# Altium PCB PCB1.PcbDoc
Units mil, origin at the board's own origin, x right, y up, seen from the top; angles counter-clockwise.
Board outline 1935 x 1065 mil, 4 copper layers (Top Layer, GND, VIN +, Bottom Layer), stack 23.756 mil thick; 28 components, 18 nets, 74 pads, 26 vias.
Unrouted connection lines stored in the file: 21.
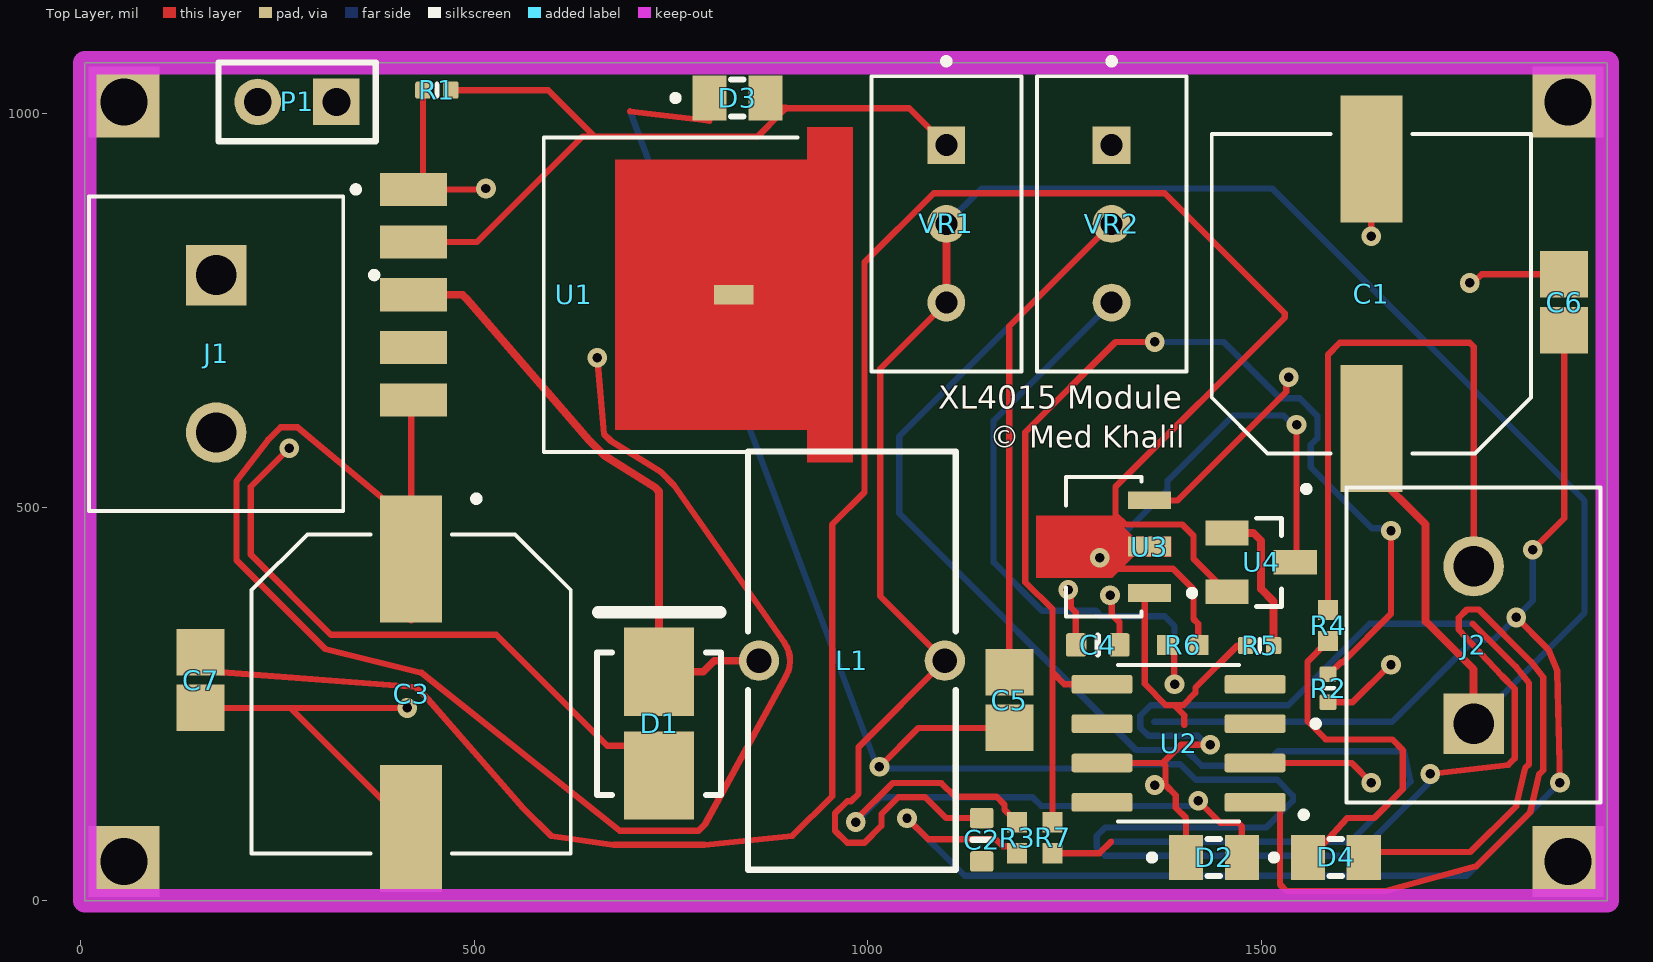
[diagram p0: Top Layer view]
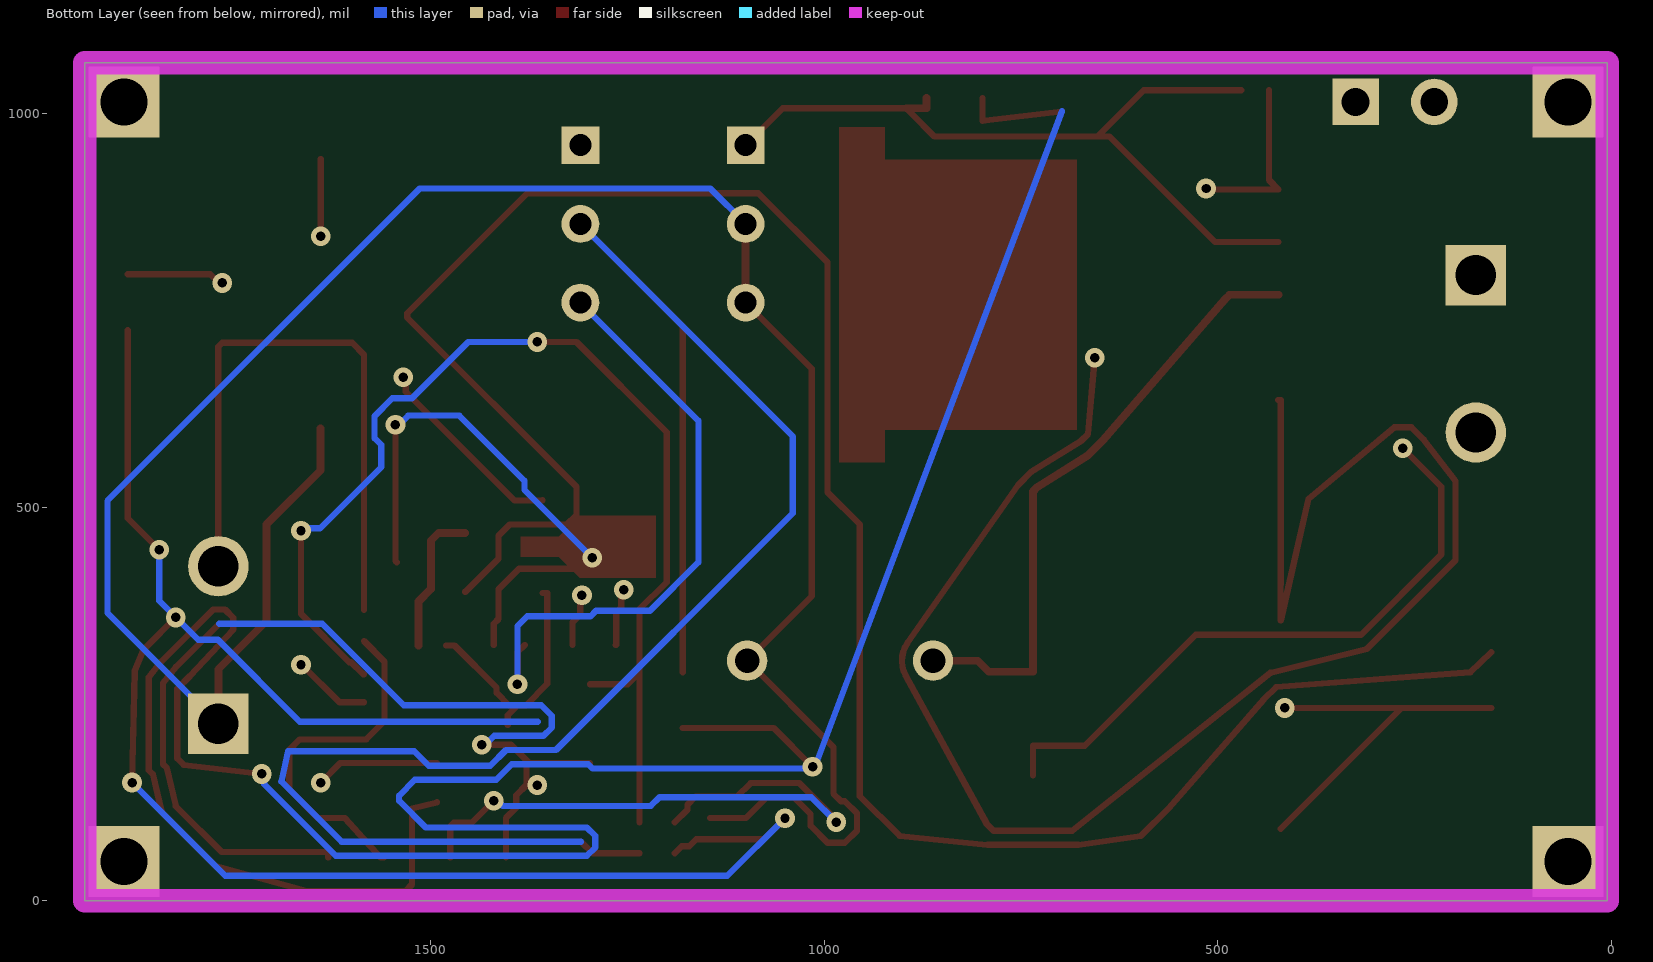
[diagram p1: Bottom Layer view, seen from below]
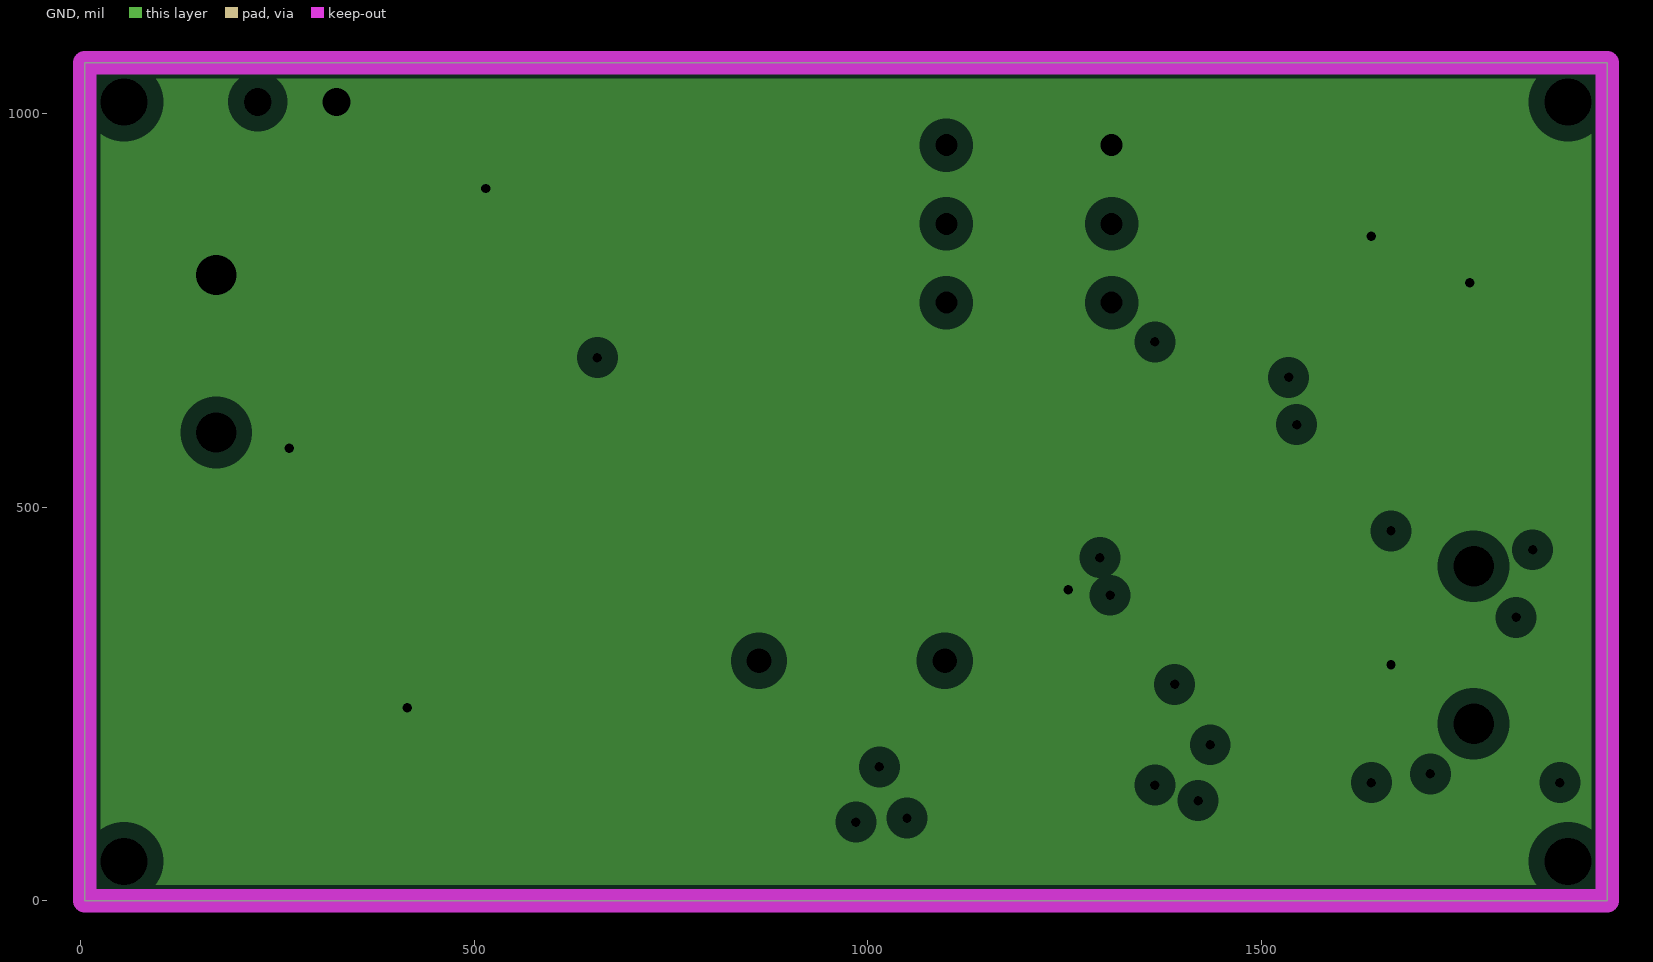
[diagram p2: GND, clearances drawn from the general rule]
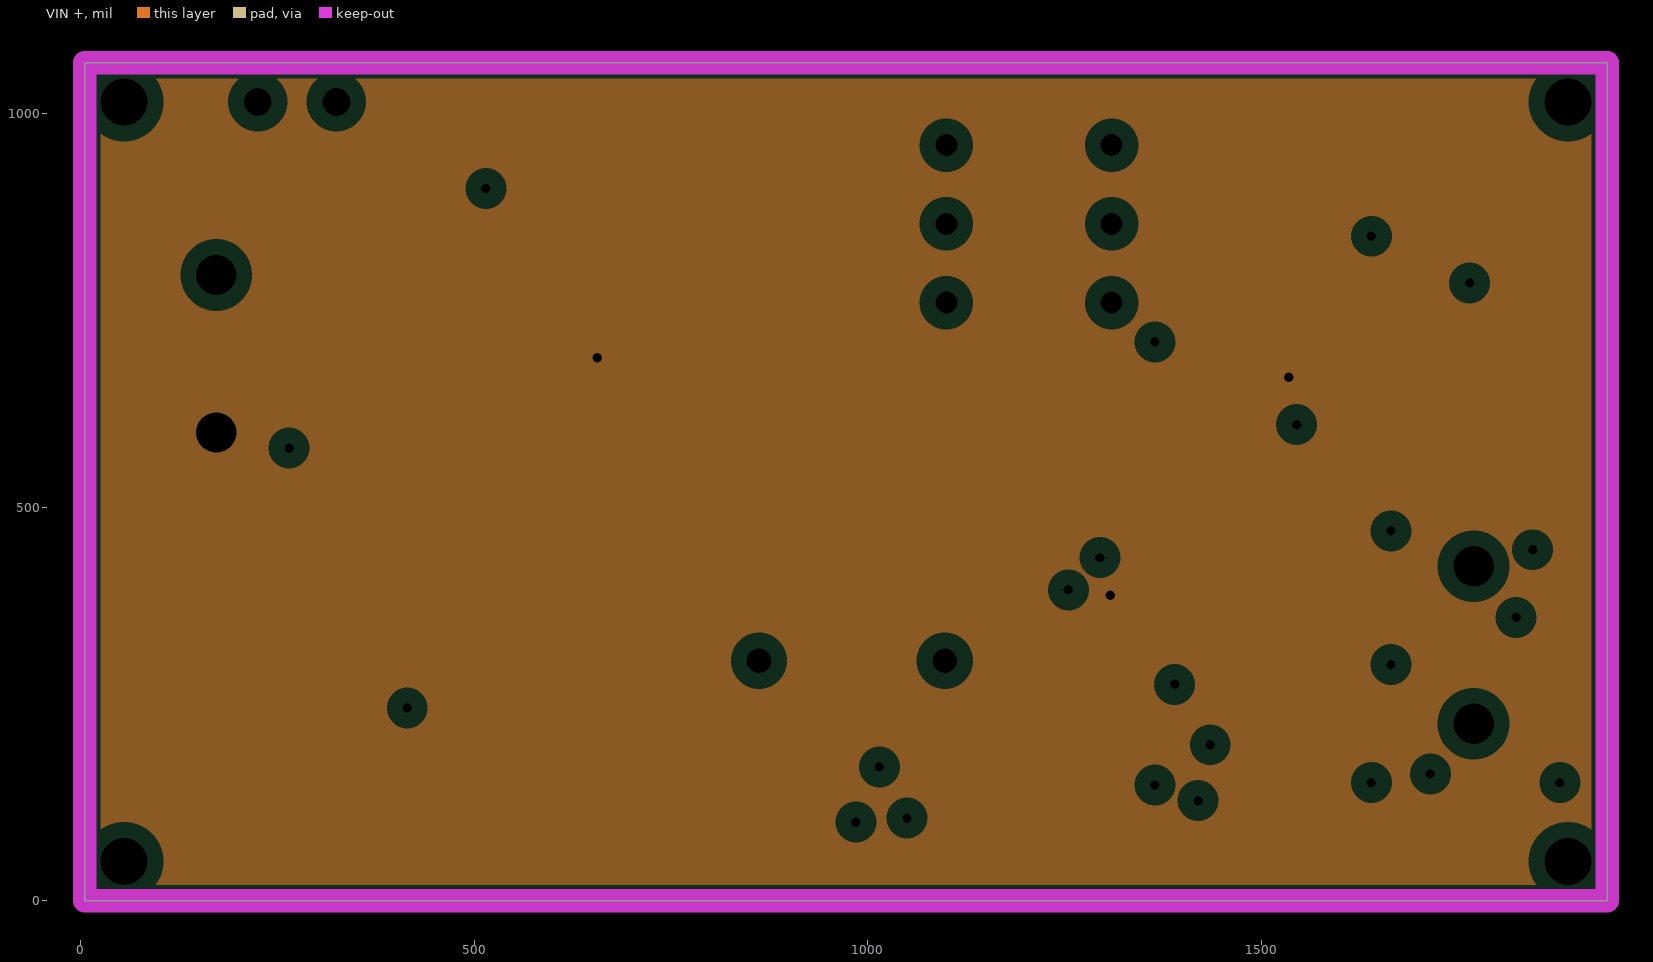
[diagram p3: VIN +, clearances drawn from the general rule]
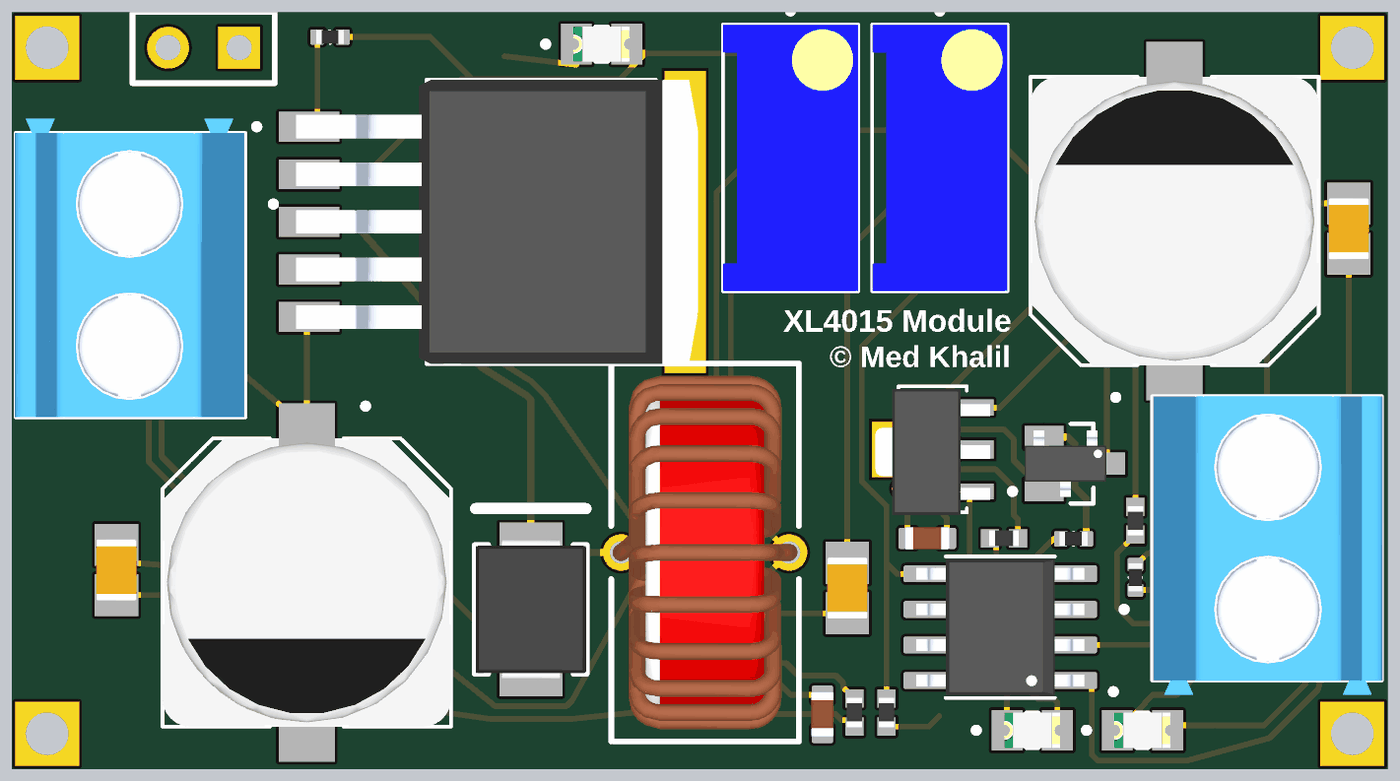
[diagram p4: 3D render of the assembled board from above, using the file's embedded part models]

## Layer stack, top to bottom
Top Solder: solder mask 0.4, Solder Resist, Dk 3.5
Top Layer: signal copper 1.4
Dielectric 2: prepreg 2.8, PP-006, Dk 4.1
GND: plane copper 1.378, net GND
Dielectric 1: dielectric 12.6, FR-4, Dk 4.8
VIN +: plane copper 1.378, net VIN +
Dielectric 3: prepreg 2.8, PP-006, Dk 4.1
Bottom Layer: signal copper 1.4
Bottom Solder: solder mask 0.4, Solder Resist, Dk 3.5

## Board outline
5,0 5,1065 1940,1065 1940,0

## Design rules (kind name [scope] priority, off if disabled: settings)
Clearance [All] p1: gap=10 ignorepadtopadclearanceinfootprint=FALSE
PlaneClearance [All] p1: clearance=20
PlaneConnect [All] p1: planeconnectstyle=Relief reliefexpansion=20 reliefentries=4 reliefconductorwidth=10 reliefairgap=10
PolygonConnect [All] p1: connectstyle=Relief reliefconductorwidth=10 reliefentries=4 polygonreliefangle="90 Angle" airgapwidth=10
RoutingVias [All] p1: holewidth=12 width=25 viastyle="Through Hole" minholewidth=12 minwidth=25 maxholewidth=12 maxwidth=25
SolderMaskExpansion [All] p1: expansion=4 istentingtop=FALSE
SupplyNets "Schematic Supply Nets" [InNet('GND')] p1: voltage=0.000
Width [All] p1: maxlimit=8 minlimit=8 preferedwidth=8 minimp=50.000000 maximp=50.000000 favimp=50.000000
28 further rules are at their usual default settings.

## Components (designator, comment, footprint, x,y, rotation, side; value= is the part's Value field where it differs from the comment)
C1 "EEEFN1V471UP" CAP_EEEFN1V471UP 1640,771.26 r90 top
C2 "Capacitor 10µF +/-20% 10V 0603" CAPC0603(1608)100_L 1145,77.44 r90 top value=10µF
C3 "EEEFN1V471UP" CAP_EEEFN1V471UP 420,262.8 r270 top
C4 "Capacitor 10µF +/-20% 10V 0603" CAPC0603(1608)100_L 1292.44,325 r0 top value=10µF
C5 "Capacitor 1 uF +/- 10% 25 V 0805" CAPC2013X145X50ML20T25 1180,255 r270 top value=1µF
C6 "Capacitor 1 uF +/- 10% 25 V 0805" CAPC2013X145X50ML20T25 1885,760.43 r270 top value=1µF
C7 "Capacitor 1 uF +/- 10% 25 V 0805" CAPC2013X145X50ML20T25 152.48,280.43 r90 top value=1µF
D1 "SS54B" JCET-SMB-2_M 735,225 r90 top
D2 "597-3305-607F" LEDC2012X70N 1440,55 r0 top
D3 "597-3305-607F" LEDC2012X70N 834.57,1020 r0 top
D4 "597-3305-607F" LEDC2012X70N 1595,55 r0 top
J1 "TB006-508-02BE" CUI_TB006-508-02BE 172.24,795 r270 top
J2 "TB006-508-02BE" CUI_TB006-508-02BE 1770,225 r90 top
L1 "15µH" 7447035 980,305 r90 top
P1 "Header 2" HDR1X2 325,1015 r180 top
R1 "Resistor 240R +/-5 % 0402 63 mW" RESC0402(1005)_L 452.72,1030 r0 top value=240
R2 "Resistor 10K  +/-1 % 0402 63 mW" RESC0402(1005)_L 1585,270 r90 top value=10k
R3 "Resistor 1k +/-1% 0402 100 mW" RESC1005X40X25ML05T05 1190,80 r90 top value=1k
R4 "Resistor 1k +/-1% 0402 100 mW" RESC1005X40X25ML05T05 1585,349.69 r270 top value=1k
R5 "Resistor 2K2  +/-5 % 0402 63 mW" RESC0402(1005)_L 1498.07,324.27 r0 top value=2.2k
R6 "Resistor 100k +/-1% 0402 63 mW" RESC1005X40X25ML05T05 1400.32,325 r180 top value=100k
R7 "Resistor 100k +/-1% 0402 63 mW" RESC1005X40X25ML05T05 1235,80 r270 top value=100k
U1 "XL4015" CONV_XL4015 830,770 r0 top
U2 "LM358D" SOIC127P599X175-8N 1395,200 r180 top
U3 "L78L05ABUTR" VREG_L78L05ABUTR 1300,450 r180 top
U4 "TL431LIBCDBZR" SOT23 1500,430 r270 top
VR1 "3296W1103LF" TRIM_3296W1103LF 1100,860 r270 top
VR2 "3296W1103LF" TRIM_3296W1103LF 1310,860 r270 top

## Footprints (in the part's own frame and the unit in brackets; to place one, negate y for a bottom-side part, rotate by r counter-clockwise, add the part's x,y. Pads: shape width x height; smd on the part's side, far side on the other; paste and mask are expansions set on the pad)
7447035 [mm] "Leaded Toroidal Line Choke, 2-leads, body 13.5x6.7mm"
  round 1.3 hole 0.8: 1(0,3) 2(0,-3)
  silkscreen extent -6.75,-3.35 6.75,3.35, body extent -6.31,-3.3 6.31,3.3, height 12.41
CAP_EEEFN1V471UP [mm]
  rect 4.1x2 smd: 1(-4.35,0) 2(4.35,0)
  silkscreen extent -6.4,-5.15 5.15,5.15, body extent -5.85,-5.15 5.85,5.15, height 9.3
CAPC0603(1608)100_L [mm] "Chip Capacitor, Body 1.6x0.8mm, Height 1.0mm, IPC High Density"
  rrect25% 0.66x0.76 smd: 1(-0.7,0) 2(0.7,0)
  silkscreen extent 0,-0.3 0,0.3, body extent -0.8,-0.4 0.8,0.4, height 0.95
CAPC2013X145X50ML20T25 [mm] "Chip Capacitor, 2-Leads, Body 2.2x1.45mm, IPC Low Density"
  rect 1.5x1.55 smd: 1(-0.9,0) 2(0.9,0)
  body extent -1.1,-0.72 1.1,0.73, height 1.45
CONV_XL4015 [mm]
  rect 2.16x1.07 smd: 1(-10.335,3.4) 2(-10.335,1.7) 3(-10.335,0) 4(-10.335,-1.7) 5(-10.335,-3.4)
  rect 1.27x0.635 smd paste-2 mask+0: 3.1(0,0)
  Top Layer region: 3.835,-5.4 2.365,-5.4 2.365,-4.35 -3.835,-4.35 -3.835,4.35 2.365,4.35 2.365,5.4 3.835,5.4
  silkscreen extent -12.3,-5.08 2.05,5.08, body extent -10.79,-5.08 3.55,5.08, height 4.7
CUI_TB006-508-02BE [mm]
  rect 1.95x1.95 / inner round 1.95 / far side rect 1.95x1.95 hole 1.3: 1(0,0)
  round 1.95 hole 1.3: 2(5.08,0)
  silkscreen extent -2.54,-4.1 7.62,5.2, body extent -3.04,-4.14 7.62,4.06, height 10
HDR1X2 [mm] "Connector; Header; 2 Position"
  rect 1.5x1.5 hole 0.9: 1(0,0)
  round 1.5 hole 0.9: 2(2.54,0)
  silkscreen extent -1.27,-1.27 3.81,1.27
JCET-SMB-2_M [mm] "Molded Diode, 2-Leads, Body 4.57x3.94mm"
  rect 2.85x2.25 smd: 1(-1.675,0) 2(1.675,0)
  silkscreen extent -2.3,-2 3.6,2, body extent -2.5,-1.97 2.5,1.97, height 2.44
LEDC2012X70N [mm]
  rect 1.1x1.45 smd: A(0.9,0) C(-0.9,0)
  silkscreen extent -2.1,-0.6 0.2,0.6, body extent -1,-0.63 1,0.63, height 0.7
RESC0402(1005)_L [mm] "Chip Resistor, Body 1.0x0.5mm, IPC High Density"
  rrect25% 0.5x0.55 smd: 1(-0.45,0) 2(0.45,0)
  silkscreen extent 0,-0.2 0,0.2, body extent -0.5,-0.25 0.5,0.25, height 0.3
RESC1005X40X25ML05T05 [mm] "Chip Resistor, 2-Leads, Body 1.05x0.55mm, IPC Low Density"
  rect 0.65x0.65 smd: 1(-0.5,0) 2(0.5,0)
  body extent -0.53,-0.28 0.53,0.28, height 0.4
SOIC127P599X175-8N [mm]
  rrect25% 1.97x0.6 smd: 1(-2.47,1.905) 2(-2.47,0.635) 3(-2.47,-0.635) 4(-2.47,-1.905) 5(2.47,-1.905) 6(2.47,-0.635) 7(2.47,0.635) 8(2.47,1.905)
  silkscreen extent -4.14,-2.53 1.95,2.53, body extent -3,-2.45 3,2.45, height 1.75
SOT23 [mm]
  rect 0.8x1.4 smd: 1(-0.95,-1.1) 2(0.95,-1.1) 3(0,1.1)
  silkscreen extent -1.42,-0.15 1.42,0.66, body extent -1.46,-1.52 1.46,0.85, height 1.12
TRIM_3296W1103LF [mm]
  rect 1.218x1.218 hole 0.71: 1(-2.54,0)
  round 1.218 hole 0.71: 2(0,0) 3(2.54,0)
  silkscreen extent -5.35,-2.41 4.76,2.42, body extent -4.76,-2.41 4.76,2.42, height 11.18
VREG_L78L05ABUTR [mm]
  rect 1.4x0.57 smd: 1(-1.475,1.5) 3(-1.475,-1.5)
  rect 1.4x0.65 smd paste-2 mask+0: 2(-1.475,0)
  Top Layer region: 2.175,-1 -0.275,-1 -0.95,-0.325 -2.175,-0.325 -2.175,0.325 -0.95,0.325 -0.275,1 2.175,1
  silkscreen extent -2.95,-2.25 1.22,2.25, body extent -2.05,-2.16 2.05,2.34, height 1.6

## Part data
C1 C3: "CAP ALUM 470UF 20% 35V SMD", Package="RADIAL-2 Panasonic", Availability="In Stock", Check_prices=https://www.snapeda.com/parts/EEE-FN1V471UP/Panasonic/view-part/6178317/?ref=eda, MF="Panasonic Electronic Components", MP=EEE-FN1V471UP, Price=None, SnapEDA_Link=https://www.snapeda.com/parts/EEE-FN1V471UP/Panasonic/view-part/6178317/?ref=snap
C2 C4: library part CMP-001-00075-4, "Chip Capacitor, 10µF +/-20%, 10V, 0603, Thickness 1 mm", Case/Package=0603, Max Operating Temperature=85°C, Min Operating Temperature=-55°C, Tolerance=10%, Voltage Rating=10V, Mounting Technology=SMT, Pins=2
C5 C6 C7: library part CMP-001-00010-6, "Chip Capacitor, 1 uF, +/-10%, 25 V, 0805 (2012 Metric)", Capacitor Type=Ceramic, Case/Package=0805, Max Operating Temperature=125°C, Min Operating Temperature=-55°C, Tolerance=10%, Voltage Rating=25V, Mounting Technology=SM, Pins=2, RoHS Compliant=True
D1: library part CMP-004-00006-2, "Schottky Barrier Rectifier, 40 V, 5 A, -55 to 150 degC, 2-Pin SMD", Case/Package=SMB-2, Manufacturer=JCET, Package Description="2-Pin Surface Mount Device, Body 4.315 x 3.62 mm", Datasheet URL=http://wiki.seeedstudio.com/images/3/3f/0310130P1.pdf, Datasheet Version=May-13, Manufacturer URL=http://www.cj-elec.com/, Mounting Technology=SM, Package Reference=SMB-2, RoHS Compliant=Unknown
D2 D3 D4: "LED Uni-Color Green 4-Pin Chip 0805 T/R", Package=None, Availability=Unavailable, MP=597-3305-607F, Price=None
J1 J2: "2~24 Poles, Screw Type, Horizontal, 5.08 Pitch, 26~14 (AWG), Terminal Block Connector", Package=None, Check_prices=https://www.snapeda.com/parts/TB006-508-02BE/Same+Sky/view-part/?ref=eda, MF="Same Sky", MP=TB006-508-02BE, SnapEDA_Link=https://www.snapeda.com/parts/TB006-508-02BE/Same+Sky/view-part/?ref=snap
L1: library part 7447035, "WE-FI THT Leaded Toroidal Line Choke, 15µH, 4.5A, 0.025Ω", DC Resistance Max=0.025Ω, Manufacturer="Wurth Elektronik", Operating Temperature Max=105°C, Operating Temperature Min=-40°C, Rated Current=4.5A, Category="Filter Chokes", ComponentLink1Description="Website Link", ComponentLink1URL=https://www.we-online.com/redexpert/article/7447035?ad, ComponentLink2Description="Datasheet Link", ComponentLink2URL=https://www.we-online.com/redexpert/spec/7447035?ad, Height=13.5mm, Inductance=15µH, Length=13.5mm, Manufacturer Part Number=7447035, Match Code=WE-FI, Mount="Through Hole", Packaging=Tray, Width=6.7mm
P1: library part CMP-002-00141-1, "Header, 2-Pin", Component Type=Standard, Design Item ID="Header 2", LatestRevisionDate=17-Jul-2002, LatestRevisionNote="Re-released for DXP Platform.", Pins=2, Publisher="Altium Limited", Source="Miscellaneous Connectors.SchLib"
R1: library part CMP-009-00155-3, "Chip Resistor, 240 Ohms, +/-5 %, 63 mW, -55 to 155 degC, 0402", Case/Package=0402, Max Operating Temperature=155°C, Min Operating Temperature=-55°C, Power=63mW, Tolerance=5%, Pins=2
R2: library part CMP-009-00149-3, "Chip Resistor, 10 kOhms, +/-1 %, 63 mW, -55 to 125 degC, 0402", Case/Package=0402, Max Operating Temperature=155°C, Min Operating Temperature=-55°C, Power=63mW, Tolerance=1%, Pins=2
R3 R4: library part CMP-009-00009-5, "Chip Resistor, 1 KOhm, +/- 1%, 0.1 W, -55 to 155 degC, 0402 (1005 Metric)", Case/Package=0402, Max Operating Temperature=155°C, Min Operating Temperature=-55°C, Power=100mW, Tolerance=1%, Voltage Rating=50V, Mounting Technology=SM, Pins=2, RoHS Compliant=True
R5: library part CMP-009-00166-3, "Chip Resistor, 2,2 kOhms, +/-5 %, 63 mW, -55 to 155 degC, 0402", Case/Package=0402, Max Operating Temperature=155°C, Min Operating Temperature=-55°C, Power=63mW, Tolerance=5%, Pins=2
R6 R7: library part CMP-009-00021-5, "Chip Resistor, 100 KOhm, +/- 1%, 0.063 W, -55 to 155 degC, 0402 (1005 Metric)", Case/Package=0402, Max Operating Temperature=155°C, Min Operating Temperature=-55°C, Power=63mW, Tolerance=1%, Voltage Rating=50V, Mounting Technology=SM, Pins=2, RoHS Compliant=True
U1: "5A 180KHz 36V Buck DC to DC Converter", Package=None, Check_prices=https://www.snapeda.com/parts/XL4015/XLSEMI/view-part/?ref=eda, MF=XLSEMI, MP=XL4015, SnapEDA_Link=https://www.snapeda.com/parts/XL4015/XLSEMI/view-part/?ref=snap
U2: "Op Amp Dual Low Power Amplifier Â±15V/30V 8-Pin SO N Tube", Package=None, Check_prices=https://www.snapeda.com/parts/LM358D/STMicroelectronics/view-part/?ref=eda, MF=STMicroelectronics, MP=LM358D, SnapEDA_Link=https://www.snapeda.com/parts/LM358D/STMicroelectronics/view-part/?ref=snap
U3: "Linear Voltage Regulator IC Positive Fixed 1 Output 100mA SOT-89-3", Package="SOT-89-3 STMicroelectronics", Check_prices=https://www.snapeda.com/parts/L78L05ABUTR/STMicroelectronics/view-part/?ref=eda, MF=STMicroelectronics, MP=L78L05ABUTR, SnapEDA_Link=https://www.snapeda.com/parts/L78L05ABUTR/STMicroelectronics/view-part/?ref=snap
U4: "Adjustable precision shunt regulator with optimized reference current (pin layout: KRA)", Package="SOT-23-3 Texas Instruments", Check_prices=https://www.snapeda.com/parts/TL431LIBCDBZR/Texas+Instruments/view-part/?ref=eda, MF="Texas Instruments", MP=TL431LIBCDBZR, SnapEDA_Link=https://www.snapeda.com/parts/TL431LIBCDBZR/Texas+Instruments/view-part/?ref=snap
VR1 VR2: "Trimmer, Potentiometer 10kohm 25turn Thd", Package=None, Availability=Unavailable, Check_prices=https://www.snapeda.com/parts/3296W1103LF/Bourns/view-part/2487625/?ref=eda, MF=Bourns, MP=3296W1103LF, Price=None, SnapEDA_Link=https://www.snapeda.com/parts/3296W1103LF/Bourns/view-part/2487625/?ref=snap

## Free pads (board coordinates)
  rect 90x90 hole 60: 4(55,50) 4(55,1015) 4(1890,50) 4(1890,1015)

## Via types
v1: diameter 25, hole 12, Top Layer to Bottom Layer, 26 vias

## Nets (pads, with @x,y where several pads share a name; then routed paths per layer and width w, separated by ;. In a path a pad name is that pad's centre, name@x,y a point inside that pad or via, vN(x,y) a via of type N, cw(c..) or ccw(c..) an arc to the next point about the centre after c; other vN are vias at no path point)
D1: C5.2 D3.C U2.1 | length 3645
  Top Layer w8: 698,1002.99 795.74,991.4 799.13,991 D3.C ; v1(1015,170.18) 1015.18,170.18 1064.57,219.57 C5.2 ; U2.1 1523.91,117.19 1523.91,20.66 1532.11,12.46 1657.89,12.46 1773.46,44 1842,112.54 1853.17,160.69 1858.39,165.9 1858.39,284.1 1842,304.46 1776.46,370 1761.54,370 1751,359.46 1751,344.54 1806,285.57 1822.39,269.18 1822.39,180.82 1814.18,172.61 v1(1715.04,161.11)
  Bottom Layer w8: 698,1002.99 1010.31,174.69 1010.5,174.69 v1(1015,170.18) ; v1@1014.94,170.06 1017,168 1294.34,168 1296.68,170.35 1299.84,173.5 1397.08,173.5 1416.92,153.65 1520.3,153.65 1540.41,133.54 1540.41,126.92 1506.49,93 1301.72,93 1291.18,82.46 1291.18,67.54 1301.72,57 1620.89,57 1711.79,147.9 1711.79,157.85 v1(1715.04,161.11)
D2: C5.1 R7.2 U2.2 VR2.2 | length 2575
  Top Layer w8: C5.1 1180,730 VR2.2 ; R7.2 1294.49,60.31 1309.18,75 ; U2.2 1615,175 v1(1640,150)
  Bottom Layer w8: 1309.18,75 1613.43,75 1690,151.57 1681.57,190 1521.19,190 1502.84,171.65 1424.38,171.65 1404.53,191.5 1341.04,191.5 1040,492.54 1040,590 VR2.2
D5: R2.2 R7.1 U2.5 | length 1457.9
  Top Layer w8: R7.1 1235,290 ; U2.5 1250,275 1235,290 ; v1(1365,710) 1315,710 1200.37,595.37 1200.37,404.83 1235,370.2 1235,290 ; R2.2 1585.98,287.72 1601.47,303.2 1603.59,303.2 1665,364.61 v1(1665,470)
  Bottom Layer w8: v1(1365,710) 1452.52,710 1524.02,638.5 1548.98,638.5 1571.5,615.98 1571.5,587.8 1562.94,579.24 1562.94,551.06 1640.75,473.25 1661.75,473.25 v1(1665,470)
D7: D2.C D4.A U2.7 | length 1365.7
  Top Layer w8: U2.7 1375,175 ; v1(1365,147) 1378.5,147 ; D2.C 1404.46,55.1 1404.46,105.21 1391.48,118.19 1391.48,134.02 1378.5,147 ; v1(1435.36,198.15) 1398.15,198.15 1375,175 ; D4.A 1630.43,62 1766,62 1821.66,117.66 1824,120 1835.17,168.15 1840.39,173.36 1840.39,276.64 1824,297 1821.66,299.34 1769,352 ; 1375,175 1378.5,171.5 1378.5,147
  Bottom Layer w8: v1(1435.36,198.15) 1430.76,198.15 1419.41,209.5 1356.85,209.5 1346.31,220.04 1346.31,234.96 1359.85,248.5 1534.5,248.5 1638,352 1769,352
FB: D3.A R1.2 U1.2 VR1.1 | length 1012.8
  Top Layer w8: U1.2 503.5,836.93 637.57,971 653,971 ; R1.2 594,1030 653,971 ; VR1.1 1053,1007 896,1007 889.5,1000.5 860,971 653,971
  Top Layer w10: D3.A 870,1007 896,1007
GND: C1.2 C2.1 C3.2 C4.1 C6.1 C7.1 D1.1 J1.1 P1.1 R1.1 R2.1 U1.1 U2.3 U2.6 U3.2 VR2.1 | length 1912.4
  Top Layer w8: C7.1 266.54,245 ; v1(265,575) 216,526 216,440 318,338 528,338 669,197 735,197 D1.1 ; v1(415,245) 266.54,245 ; C3.2 266.54,245 ; R1.1 435,915.75 U1.1 513.86,903.86 v1(515,905) ; v1(1255,395) 1258.25,391.75 1258.25,372.84 1264.59,366.5 1264.59,325.29 C4.1 ; R2.1 1616.1,252.28 1663.82,300 v1(1665,300) ; v1(1640,844.31) C1.2 ; v1(1765,785) 1769.6,785 1780.47,795.87 C6.1
NetC7_2: C7.2 U4.2 | length 2793.3
  Top Layer w8: C7.2 178.99,290.34 425.98,271.5 441.5,255.98 562.34,117.66 597.66,82.34 677.45,70.95 792.55,70.95 904.41,82.34 955,132.93 955,478.14 995.98,519.12 995.98,811.1 1083.86,898.98 1377.59,898.98 1530,746.57 1530,740.98 1315,525.98 1315,490 1327,478 1400,478 1414,464 1414,434.6 1456,392.6 U4.2
NetD2_A: D2.A R3.2 | length 815.3
  Top Layer w8: v1(985,100) 985,102.93 1031.57,149.5 1093.68,149.5 1111.18,132 1163.86,132 1173.96,121.9 1173.96,115.73 R3.2 ; v1(1420,127.15) 1447.96,99.19 1470.75,99.19 1475.43,94.5 D2.A
  Bottom Layer w8: v1(985,100) 1016.5,131.5 1209.42,131.5 1220.42,120.5 1408.75,120.5 1415.4,127.15 v1(1420,127.15)
NetD4_C: D4.C R4.2 | length 456.7
  Top Layer w8: D4.C 1564,55 1609,105 1643.43,105 1680,141.57 1680,191.57 1666.57,205 1582,205 1559,228 1559,304 R4.2
NetR5_2: R5.2 U4.1 | length 187.1
  Top Layer w10: U4.1 1490,467.4 1500,457.4 1500,396 1515.78,380.22 R5.2
NetR6_1: R6.1 U4.3 | length 729.2
  Top Layer w8: v1(1295,436) 1295,422 1388,422 1414,396 1414,358 1420,352 R6.1 ; U4.3 1545,431.69 v1(1545,605)
  Bottom Layer w8: v1(1295,436) 1381.14,522.14 1381.14,533.61 1464.02,616.5 1528.9,616.5 1540.4,605 v1(1545,605)
NetR6_2: R6.2 VR2.3 | length 783.6
  Top Layer w8: R6.2 1389.43,316.2 1389.43,275.57 v1(1390,275)
  Bottom Layer w8: VR2.3 1160,610 1160,430 1221.5,368.5 1290.16,368.5 1297.03,361.63 1377.37,361.63 1390,349 v1(1390,275)
OUT: C6.2 R3.1 R5.1 U3.1 | length 2528.5
  Top Layer w8: v1(1050,105) 1077,78 1162.74,78 1171.63,69.11 1181.2,69.11 R3.1 ; U3.1 1352,390.94 1352,275.52 1379.02,248.5 1389.4,248.5 ; 1402.23,223.23 1402.23,235.67 1389.4,248.5 ; R5.1 1470,324.27 1416.5,270.77 1416.5,264.02 1400.98,248.5 1389.4,248.5 ; v1(1824,360) 1862.66,321.34 1865,319 1876.39,291.55 v1(1879.67,150.12) ; v1(1845,446) 1885,486 C6.2
  Bottom Layer w8: v1(1050,105) 1123.22,31.78 1761.33,31.78 v1(1879.67,150.12) ; 1364.31,227.5 1666.5,227.5 1770.5,331.5 1795.5,331.5 v1(1824,360) 1845,381 v1(1845,446)
SW: D1.2 L1.1 U1.3 | length 779.7
  Top Layer w10: U1.3 485,770 490.86,764.14 646.02,585.07 665.35,565.74 729.14,525.86 735,520 D1.2 791,290.94 805.06,305 L1.1
VCC: P1.2
"VIN +": C3.1 C4.2 J1.2 U1.5 U3.3 | length 2544.8
  Top Layer w8: U1.5 420,636.14 C3.1 420.37,367.38 420,356 384.63,510.76 275.98,601.5 254.02,601.5 238.5,585.98 198,533.46 198,432.54 310.54,320 433.43,289.5 684.91,88.95 785.09,88.95 793.29,97.15 896.62,286 ccw(c861.89,305) 894.25,327.81 754,527.87 737.01,544.86 673.22,584.74 665.02,592.94 v1(656.52,690) ; v1(1308.01,388.13) 1310.12,386.02 1310.12,363.63 1320,353.75 C4.2 ; U3.3 1358.67,508.46 1393.46,508.46 1531.75,646.75 1531.75,661.75 v1(1535,665)
"VOUT +": C1.1 C2.2 J2.1 L1.2 VR1.2 VR1.3 | length 2901.5
  Top Layer w8: VR1.3 1015.98,675.98 1015.98,387.13 L1.2 988.5,195.39 988.5,136.19 978.81,126.5 974.02,126.5 958.5,110.98 958.5,89.02 974.02,73.5 995.98,73.5 1017.5,95.02 1017.5,109.98 1039.02,131.5 1073.28,131.5 1099.78,105 C2.2
  Top Layer w10: VR1.3 VR1.2 ; C1.1 1640,547 1709,478 1709,355 1770,294 J2.1
  Bottom Layer w8: VR1.2 1145,905 1514,905 1911,508 1911,366 J2.1
"VOUT -": J2.2 R4.1 | length 796.9
  Top Layer w8: R4.1 1585,694 1600,709 1765,709 1770,704 J2.2
pads on no net: U1.3.1 U1.4 U2.4 U2.8

## Polygon pours and split planes (outlines as drawn)
GND on GND (split plane): 1919.9,20.1 25.1,20.1 25.1,1044.9 1919.9,1044.9
"VIN +" on VIN + (split plane): 1919.9,20.1 25.1,20.1 25.1,1044.9 1919.9,1044.9

## Keep-outs
Keep-Out Layer:
  the board outline again, w30

## Silkscreen, mask and mechanical layers (free items; w line width, h text height)
Top Overlay:
  text "XL4015 Module" at 1090,615.6 h50
  text "© Med Khalil" at 1155,565.75 h48